# Altium PCB ChildPCBRocket.PcbDoc
Units mil, origin at the board's own origin, x right, y up, seen from the top; angles counter-clockwise.
Board outline 1300 x 3325 mil, 2 copper layers (Top Layer, Bottom Layer); 18 components, 16 nets, 91 pads, 0 vias.
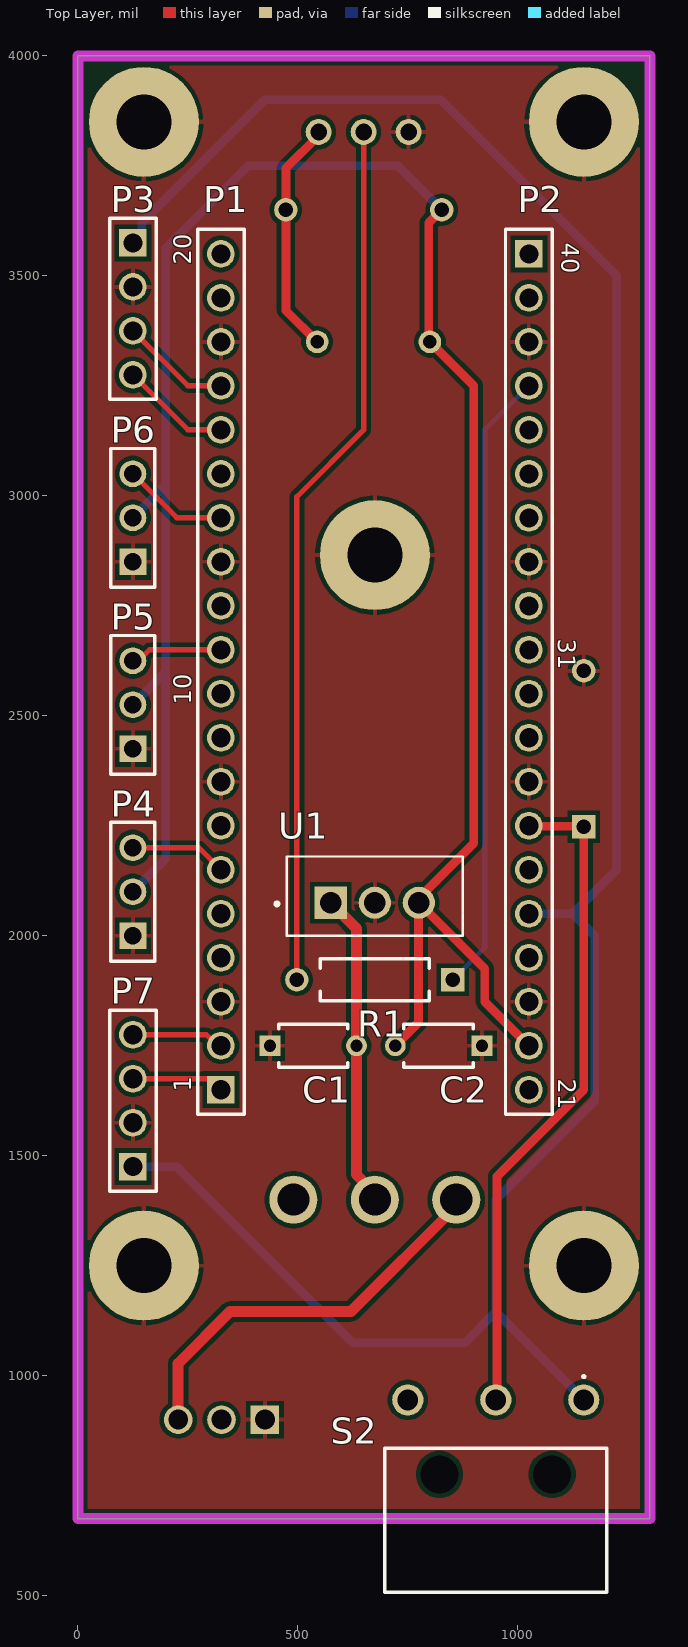
[diagram p0: Top Layer view]
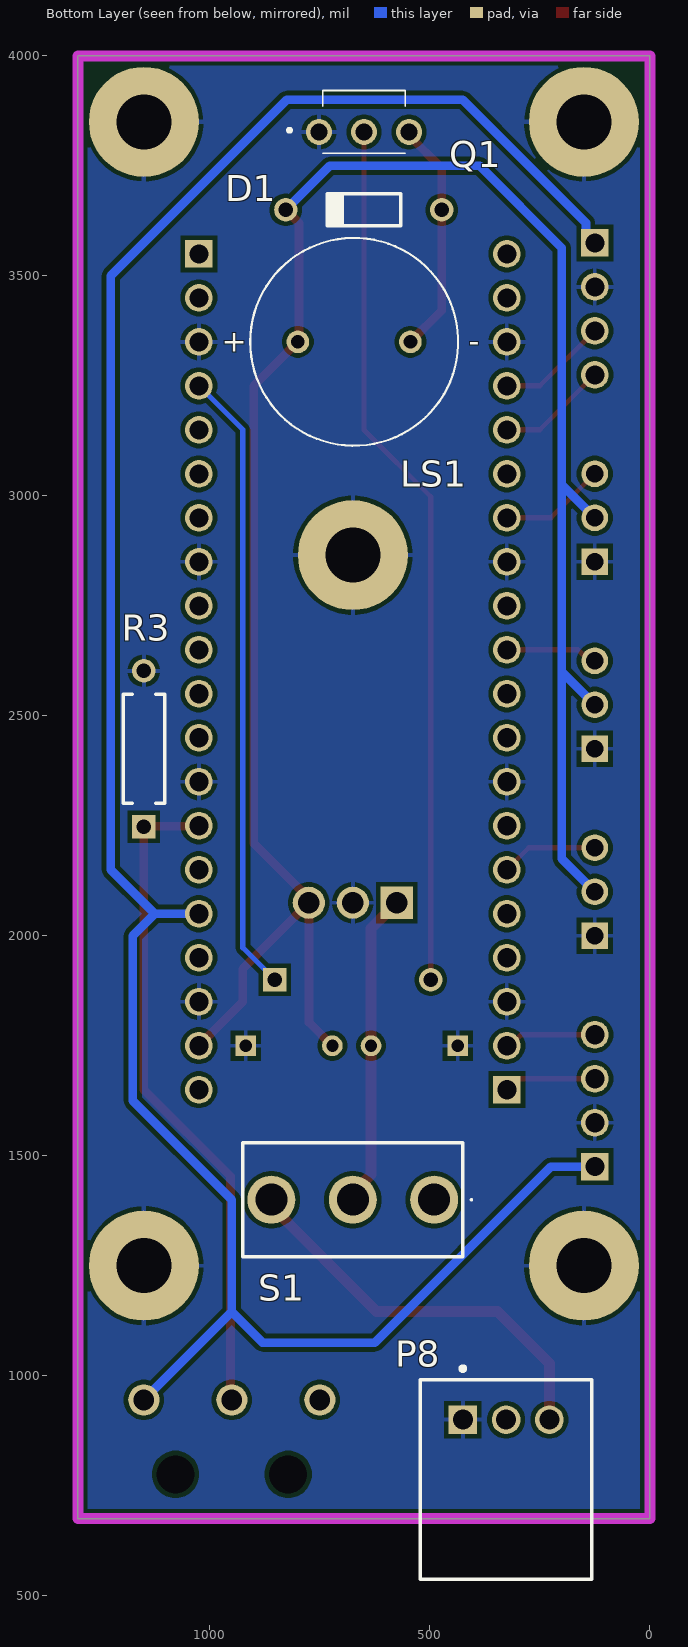
[diagram p1: Bottom Layer view, seen from below]
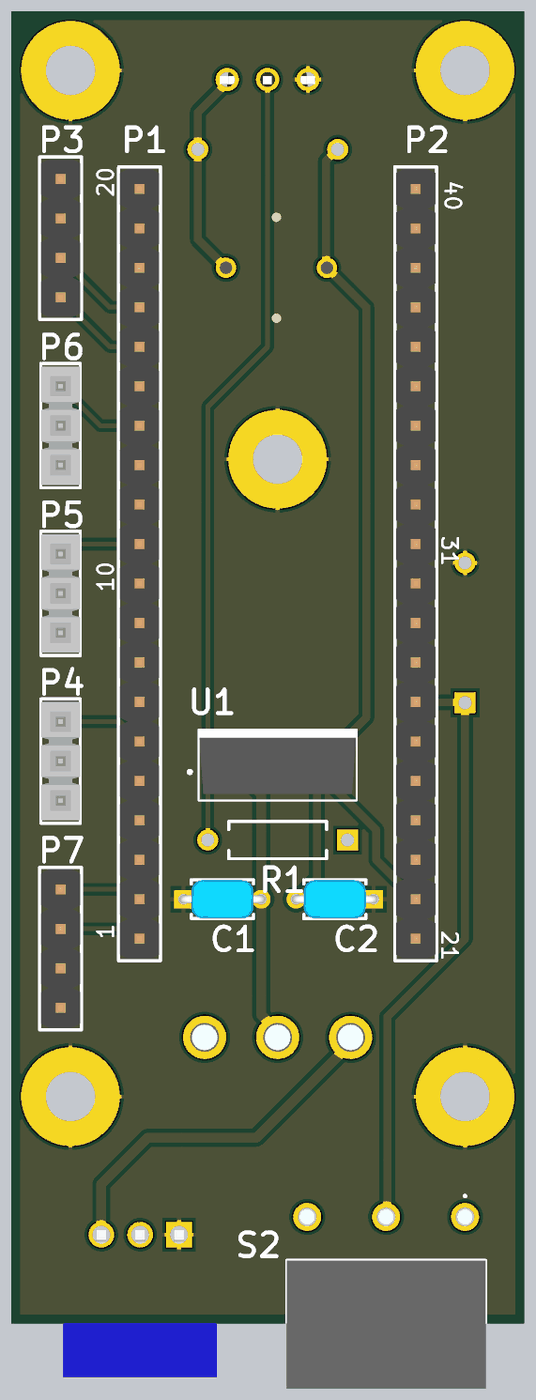
[diagram p2: 3D render of the assembled board from above, using the file's embedded part models]
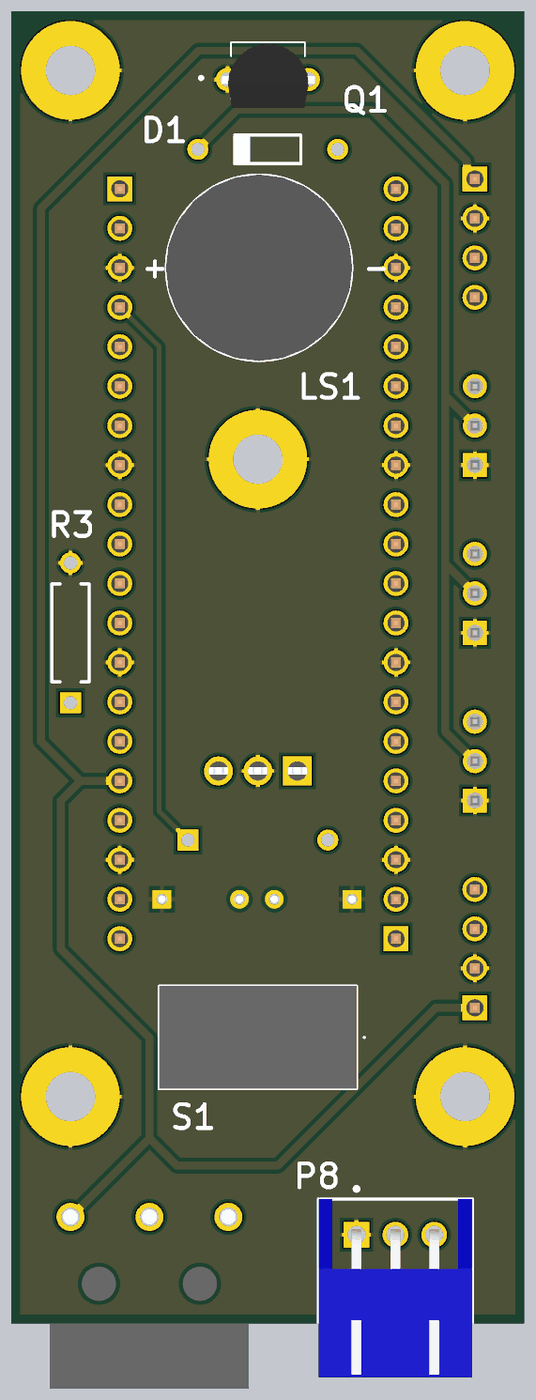
[diagram p3: 3D render of the assembled board from below, using the file's embedded part models]

## Layer stack, top to bottom
Top Solder: solder mask 0.4, Solder Resist, Dk 3.5
Top Layer: signal copper 1.4
Dielectric 1: dielectric 12.6, FR-4, Dk 4.8
Bottom Layer: signal copper 1.4
Bottom Solder: solder mask 0.4, Solder Resist, Dk 3.5

## Board outline
0,4000 1300,4000 1300,675 0,675

## Design rules (kind name [scope] priority, off if disabled: settings)
Clearance [All] p1: gap=10 ignorepadtopadclearanceinfootprint=FALSE except(0: Arc-Hole Track-Hole SMDPad-Hole THPad-Hole Via-Hole Fill-Hole Poly-Hole Region-Hole Text-Hole)
PolygonConnect [All] p1: connectstyle=Relief reliefconductorwidth=10 reliefentries=4 polygonreliefangle="90 Angle" airgapwidth=10
RoutingVias [All] p1: holewidth=15 width=30 viastyle="Through Hole" minholewidth=15 minwidth=30 maxholewidth=28 maxwidth=50
SolderMaskExpansion [All] p1: expansion=4 istentingtop=FALSE
Width [All] p1: maxlimit=50 minlimit=10 preferedwidth=12
30 further rules are at their usual default settings.

## Classes and differential pairs
component class ChildPCBRocket: C1 C2 D1 LS1 P1 P2 P3 P4 P5 P6 P7 Q1 R1 R3 S1 U1

## Components (designator, comment, footprint, x,y, rotation, side; value= is the part's Value field where it differs from the comment)
C1 "0.22uF" FP-RCE1K1-2_5-MFG 535,1750 r0 top
C2 "0.22uF" FP-RCE1K1-2_5-MFG 820,1750 r180 top
D1 "1N4148" NXP-SOD27-2_V 650,3650 r0 bottom locked
LS1 "CEM-1203" CUI_CEM-1203(42) 672.05,3350 r180 bottom locked
P1 "61302011121" 61302011121 325,2600 r90 top locked
P2 "61302011121" 61302011121 1025,2600 r270 top locked
P3 "61300411121" 61300411121 125,3425 r270 top locked
P4 "TSW-103-07-L-S" SMTC-TSW-103-07-X-S 125,2000 r90 top locked
P5 "TSW-103-07-L-S" SMTC-TSW-103-07-X-S 125,2425 r90 top locked
P6 "TSW-103-07-L-S" SMTC-TSW-103-07-X-S 125,2850 r90 top locked
P7 "61300411121" 61300411121 125,1625 r90 top locked
P8 "S3B-XH-A(LF)(SN)" JST-S3B-XH-A(LF)(SN)_V 326.57,900 r180 bottom locked
Q1 "2N3904TF" BC33740TA 685,3850 r180 bottom locked
R1 "MFR-25FBF52-100R" RESA60-630X240 675,1900 r180 top locked value=180R
R3 "MFR-25FBF52-100R" RESA60-630X240 1150,2425 r90 bottom locked value=10K
S1 "SS12D10" SS12D10 490,1400 r90 bottom locked
S2 "D2F-01FL-A" D2F01FLA 1150,945 r180 top locked
U1 "LM340AT-5.0/NOPB" TO254P1054X470X1955-3 675,2075 r0 top locked

## Footprints (in the part's own frame and the unit in brackets; to place one, negate y for a bottom-side part, rotate by r counter-clockwise, add the part's x,y. Pads: shape width x height; smd on the part's side, far side on the other; paste and mask are expansions set on the pad)
61300411121 [mm] "Pin Header, pitch 2.54 mm, THT, Vertical, single row, 4p"
  rect 1.6x1.6 hole 1.1: 1(-3.81,0)
  round 1.6 hole 1.1: 2(-1.27,0) 3(1.27,0) 4(3.81,0)
  silkscreen extent -5.23,-1.35 5.23,1.35, body extent -5.08,-1.27 5.08,1.27, height 8.57
61302011121 [mm] "Pin Header, pitch 2.54 mm, THT, Vertical, single row, 20p"
  rect 1.6x1.6 hole 1.1: 1(-24.13,0)
  round 1.6 hole 1.1: 2(-21.59,0) 3(-19.05,0) 4(-16.51,0) 5(-13.97,0) 6(-11.43,0) 7(-8.89,0) 8(-6.35,0) 9(-3.81,0) 10(-1.27,0) 11(1.27,0) 12(3.81,0) 13(6.35,0) 14(8.89,0) 15(11.43,0) 16(13.97,0) 17(16.51,0) 18(19.05,0) 19(21.59,0) 20(24.13,0)
  silkscreen extent -25.55,-1.35 25.55,1.35, body extent -25.4,-1.27 25.4,1.27, height 8.57
BC33740TA [mm]
  round 1.493 hole 0.96: 1(-1.7,-0.585) 2(0.9,-0.585) 3(3.5,-0.585)
  silkscreen extent -3.5,-1.81 3.28,1.81, body extent -2.16,-2.42 4,1.71, height 8.67
CUI_CEM-1203(42) [mm]
  round 1.308 hole 0.8: N(3.25,0) P(-3.25,0)
  silkscreen extent -6,-6 6,6, body extent -6,-6 6,6, height 8.5
D2F01FLA [mm]
  round 1.8 hole 1.2: 1(0,0) 2(5.08,0) 3(10.16,0)
  round 1.1 hole 2.2 unplated: MH1(1.83,4.3) MH2(8.33,4.3)
  silkscreen extent -1.32,-1.4 11.48,11.1, body extent -1.32,-0.5 11.48,11.1, height 6.05
FP-RCE1K1-2_5-MFG [mm]
  rect 1.2x1.2 hole 0.7 paste-1000 mask+0: 1(-2.5,0)
  round 1.2 hole 0.7 paste-1000 mask+0: 2(2.5,0)
  silkscreen extent -2,-1.25 2,1.25, body extent -3.2,-1.35 3.2,1.35, height 0.25
JST-S3B-XH-A(LF)(SN)_V [mm] "Header, 3-Leads, Body 9.9x11.5mm, Pitch 2.5mm"
  rect 1.65x1.65 hole 1.15: 1(-2.5,0)
  round 1.65 hole 1.15: 2(0,0) 3(2.5,0)
  silkscreen extent -4.95,-9.2 4.95,3.08, body extent -4.95,-9.2 4.95,2.3, height 6.15
NXP-SOD27-2_V [mm] "SOD27, 2-Leads, Dia 1.85mm, Body Length 4.25mm, Pin Spacing 9mm"
  round 1.35 hole 0.85: 1(-4.5,0) 2(4.5,0)
  silkscreen extent -2.12,-0.93 2.12,0.92, body extent -4.78,-0.93 4.78,0.92, height 1.85
RESA60-630X240 [mm] "Axial Resistor, 2-Leads, Dia 2.4mm, Body Length 6.3mm"
  rect 1.35x1.35 hole 0.85: 1(-4.5,0)
  round 1.35 hole 0.85: 2(4.5,0)
  silkscreen extent -3.15,-1.2 3.15,1.2, body extent -4.77,-1.19 4.77,1.2, height 2.4
SMTC-TSW-103-07-X-S [mm] ".025 SQ Post Terminal Strip Assembly, 1x3 Pins, Vertical, 2.54mm Pitch, Male"
  rect 1.55x1.55 hole 1.02: 1(0,0)
  round 1.55 hole 1.02: 2(2.54,0) 3(5.08,0)
  silkscreen extent -1.46,-1.27 6.54,1.27, body extent -1.27,-1.27 6.35,1.27, height 8.38
SS12D10 [mm]
  round 2.775 hole 1.85: 1(0,0) 2(0,4.7) 3(0,9.4)
  silkscreen extent -3.3,-2.2 3.3,11.05, body extent -3.3,-1.65 3.3,11.05, height 10.01
TO254P1054X470X1955-3 [mm]
  rect 1.86x1.86 hole 1.24: 1(-2.54,0)
  round 1.86 hole 1.24: 2(0,0) 3(2.54,0)
  silkscreen extent -5.75,-1.91 5.08,2.67, body extent -5.08,-1.49 5.08,2.71, height 22.86

## Part data
C1 C2: library part CMP-06035-036150-1, "Cap Ceramic Monolithic 220nF 50V 10% Thru-Hole Bulk", Capacitance=220nF, Case/Package=Radial, Dielectric=X7R, Max Operating Temperature=125°C, Min Operating Temperature=-55°C, Package Quantity=1, Ratings=AEC-Q200, Resistor Type=Ceramic, Tolerance=10%, Voltage Rating=50V, Height=3.5mm, Height - Seated (Max)=0.138inch, Lead Diameter=0.5mm, Lead Pitch=0.197inch, Lead/Base Style="Formed Leads", Length=0.157inch, Mount="Through Hole", Packaging="Tape and Reel", Termination=Radial, Voltage Rating (DC)=50V, Width=0.098inch
D1: library part CMP-0648-00002-1, "High-speed Diode, 100 V, 450 mA, 2-Pin SOD27, RoHS", Manufacturer="NXP Semiconductors", Cd="4 pF Max.", ComponentLink1Description="Manufacturer URL", ComponentLink1URL=http://www.nxp.com/, ComponentLink2Description=Datasheet, ComponentLink2URL=http://www.nxp.com/documents/data_sheet/1N4148_1N4448.pdf, ComponentLink3Description="Package Specification", ComponentLink3URL=http://www.nxp.com/documents/data_sheet/1N4148_1N4448.pdf, Configuration=Single, DatasheetVersion=Aug-04, IF="200 mA Max.", IFRM="450 mA", IFSM="4 A Max.", IR (VR="20 V)=25 nA", Mounting Technology="Through Hole", PackageDescription="2-Pin Hermetically Sealed Glass Package, Axial Leaded, Dia 1.85 mm, Body Length 4.25 mm, Lead Spread 25.4 mm", PackageReference=SOD27, PackageVersion=Aug-04, PartNumber=1N4148, RoHS=TRUE, Trr="4 ns Max.", VF (IF="10 mA)=1 V", VR="100 V Max."
LS1: library part CEM-1203(42), "12 mm, 3.5 V, 85 dB, Through Hole, Magnetic Audio Transducer Buzzer", Package=None, Availability=Unavailable, MF="{'manufacturer': u'CUI Devices'}", MP=CEM-1203(42), Price=None
P1 P2: library part CMP-1502-01102-1, "THT Vertical Pin Header WR-PHD, Pitch 2.54 mm, Single Row, 20 pins", Contact Resistance=20mOhm, Manufacturer="Wurth Elektronik", Operating Temperature=-40to105degC, Rated Current=3A, Withstanding Voltage=500VAC, Working Voltage=250VAC, Datasheet URL=https://katalog.we-online.de/em/datasheet/6130xx11121.pdf, Gender=Male, Manufacturer URL=http://www.we-online.de, Mounting Technology=THT, Orientation=Vertical, Package Reference=61302011121, Packaging=Bag, Part Number=61302011121, Pin Number=20, Pitch=2.54mm, Publisher=WurthElektronik, Row Number=Single
P3 P7: library part CMP-1502-01064-1, "THT Vertical Pin Header WR-PHD, Pitch 2.54 mm, Single Row, 4 pins", Contact Resistance=20mOhm, Manufacturer="Wurth Elektronik", Operating Temperature=-40to105degC, Rated Current=3A, Withstanding Voltage=500VAC, Working Voltage=250VAC, Datasheet URL=https://katalog.we-online.de/em/datasheet/6130xx11121.pdf, Gender=Male, Manufacturer URL=http://www.we-online.de, Mounting Technology=THT, Orientation=Vertical, Package Reference=61300411121, Packaging=Bag, Part Number=61300411121, Pin Number=4, Pitch=2.54mm, Publisher=WurthElektronik, Row Number=Single
P4 P5 P6: library part CMP-1024-00334-1, "0.025\" SQ Post Header, Through-hole, Vertical, -55 to 125 degC, 2.54 mm Pitch, 3-Pin, Male, RoHS", Manufacturer=Samtec, Temperature Range="-55 to 125 degC", ComponentLink1Description="Manufacturer URL", ComponentLink1URL=http://www.samtec.com, ComponentLink2Description=Datasheet, ComponentLink2URL=http://www.samtec.com/documents/webfiles/pdf/TSW_TH.PDF, ComponentLink3Description="Package Specification", ComponentLink3URL=http://www.samtec.com/documents/webfiles/cpdf/TSW-XXX-XX-XXX-X-XX-XXX-MKT.pdf, DatasheetVersion=F-214, Mounting Technology=Through-hole, Orientation=Vertical, PackageDescription=".025[0.64] SQ. Post Terminal Strip Assembly", PackageReference=TSW-103-07-X-S, PackageVersion="DM, 8/1988", PartNumber=TSW-103-07-L-S, Pitch="2.54 mm", RoHS=True
P8: library part CMP-1755-00006-1, "Male Header, Pitch 2.5 mm, 1 x 3 Position, Height 6.1 mm, Tail Length 3.4 mm, -25 to 85 degC, RoHS, Bulk", Case\Package=DIP, Frequency="1.8 MHz", Max Operating Temperature="70 degC", Max Ouput Current="-10 mA", Max Power Dissipation="1 W", Max Supply Voltage="15 V", Min Operating Temperature="0 degC", Min Supply Voltage="1 V", Nominal Supply Current="170 uA", Package Quantity=50, Channels=1, ComponentLink1Description="Manufacturer URL", ComponentLink1URL=http://www.jst.com/home2.html, ComponentLink2Description=Datasheet, ComponentLink2URL=http://www.jst-mfg.com/product/pdf/eng/eXH.pdf, DatasheetVersion=May-16, Height="4.57 mm", Length="9.81 mm", Mount="Through Hole", PackageDescription="Male Header, Pitch 2.5 mm, 1 x 3 Position, Height 6.1 mm, Tail Length 3.4 mm", PackageReference=S3B-XH-A(LF)(SN), Packaging=Rail/Tube, Pins=8, Radiation Hardening=No, REACH SVHC="No SVHC", RoHSCompliant=true, Weight="0.015535 oz", Width="6.35 mm"
Q1: "Transistor BJT NPN", Manufacturer_Name="ON Semiconductor", Mouser Part Number=512-2N3904TF, Arrow Part Number=2N3904TF, Arrow Price/Stock=https://www.arrow.com/en/products/2n3904tf/on-semiconductor, Datasheet Link=http://www.onsemi.com/pub/Collateral/2N3904-D.pdf, Manufacturer_Part_Number=2N3904TF, Mouser Price/Stock=https://www.mouser.co.uk/ProductDetail/ON-Semiconductor-Fairchild/2N3904TF?qs=UMEuL5FsraAGLMCvg3Q72w%3D%3D
R1 R3: library part CMP-009-00046-4, "Axial Resistor, 100 Ohm, +/- 1%, 0.25 W, -55 to 155 degC, 2-Pin THD, RoHS, Bulk", Case/Package=Axial, Manufacturer=Yageo, Max Operating Temperature=155°C, Min Operating Temperature=-55°C, Package Description="2-Pin Axial Lead, Dia 2.4 mm, Body Length 6.3 mm", Package Quantity=200, Package Reference=MFR-25, Power=250mW, Tolerance=1%, Voltage Rating=250V, Composition=CarbonFilm, Datasheet URL=http://www.yageo.com/documents/recent/Yageo%20LR_MFR_2013.pdf, Datasheet Version=Apr-13, Manufacturer URL=http://www.yageo.com/, Mounting Technology=TH, Packaging=Bulk, RoHS Compliant=True
S1: "Switch", Manufacturer_Name=DAIER, Datasheet Link=https://www.chinadaier.com/slide-switch-spdt/, Height=9.91mm, Manufacturer_Part_Number=SS12D10
S2: "Switch", Manufacturer_Name="Omron Electronics", Mouser Part Number=653-D2F-01FL-A, Arrow Part Number=D2F-01FL-A, Arrow Price/Stock=https://www.arrow.com/en/products/d2f-01fl-a/omron, Datasheet Link=https://media.digikey.com/pdf/Data%20Sheets/Omron%20PDFs/D2F_0318_DS.pdf, Height=5.95mm, Manufacturer_Part_Number=D2F-01FL-A, Mouser Price/Stock=https://www.mouser.co.uk/ProductDetail/Omron-Electronics/D2F-01FL-A?qs=qyG%2FS5Z4lv1aHIvVPnq%252BCw%3D%3D
U1: Package=None, Availability=Unavailable, MF="{'manufacturer': u'Texas Instruments'}", MP=LM340AT-5.0/NOPB, Price=None

## Free pads (board coordinates)
  round 250 hole 125: 6(150,3850) 7(1150,3850) 8(150,1250) 9(1150,1250) 10(675,2865)

## Nets (pads, with @x,y where several pads share a name; then routed paths per layer and width w, separated by ;. In a path a pad name is that pad's centre, name@x,y a point inside that pad or via, vN(x,y) a via of type N, cw(c..) or ccw(c..) an arc to the next point about the centre after c; other vN are vias at no path point)
+3V3: P2.16 P3.1 P7.1 S2.1 | length 5336.5
  Top Layer w20: S2.1@1144.29,944.29 S2.1@1152.95,944.29
  Bottom Layer w20: P7.1 225,1475 625,1075 880,1075 950,1145 ; P3.1 145.21,3595.21 145.21,3620.21 425,3900 825,3900 1225,3500 1225,2150 1125,2050 ; P2.16 1125,2050 ; S2.1 950,1145 ; 950,1145 950,1400 1175,1625 1175,2000 1125,2050
+5: C2.2 D1.2 LS1.P P2.19 P4.2 P5.2 P6.2 U1.3 | length 4914.4
  Top Layer w20: C2.2 774.58,1803.01 U1.3@774.58,2075 ; LS1.P@793.97,3343.97 LS1.P@797.5,3343.97 ; LS1.P@797.5,3347.5 797.5,3620.34 D1.2 ; LS1.P 900,3250 900,2210.38 775,2085.38 U1.3 925,1925 925,1850 P2.19
  Bottom Layer w20: P4.2 200,2175 200,2600 ; P5.2 200,2600 ; P6.2 200,3025 ; D1.2 727.17,3750 386.72,3750 200,3563.28 200,3025 ; 200,2600 200,3025
+9: C1.2 S1.2 U1.1 | length 716.4
  Top Layer w25: U1.1 633.43,2016.57 C1.2 633.43,1456.77 675.04,1415.16 S1.2
+VBAT: P8.3 S1.3 | length 922.8
  Top Layer w25: P8.3 228.15,1028.15 345.76,1145.76 620.76,1145.76 860.08,1385.08 S1.3
GND: C1.1 C2.1 P1.3 P1.8 P1.13 P1.18 P2.3 P2.8 P2.13 P2.18 P3.2 P4.1 P5.1 P6.1 P7.2 P8.1 pad.6 pad.7 pad.8 pad.9 pad.10 Q1.1 R3.2 U1.2
GPIO_ACC: P2.14 R3.1 S2.2 | length 1511.1
  Top Layer w20: S2.2@952.95,944.29 952.95,1452.95 1150,1650 R3.1 1148.92,2248.92 1026.08,2248.92 P2.14
NetD1_1: D1.1 LS1.N Q1.3 | length 537.3
  Top Layer w20: LS1.N 472.83,3421.26 472.83,3744.59 547.2,3818.96 Q1.3
NetQ1_2: Q1.2 R1.2 | length 1999.3
  Top Layer w12: R1.2 497.83,2997.83 649.57,3149.57 Q1.2@649.57,3836.49
PWM1: P2.4 R1.1 | length 1421.6
  Bottom Layer w12: R1.1 925,1972.83 925,3150 P2.4
PWM2: P1.6 P4.3 | length 220.7
  Top Layer w12: P4.3 275,2200 P1.6
PWM3: P1.11 P5.3 | length 210.4
  Top Layer w12: P5.3 138.27,2625 163.27,2650 P1.11
PWM4: P1.14 P6.3 | length 241.4
  Top Layer w12: P6.3 225,2950 P1.14
SCL: P1.17 P3.3 | length 251.8
  Top Layer w12: P3.3 250,3250 P1.17
SDA: P1.16 P3.4 | length 251.8
  Top Layer w12: P3.4 250,3150 P1.16
"UART RX": P1.2 P7.4 | length 210.4
  Top Layer w12: P7.4 292.47,1775 317.47,1750 P1.2
"UART TX": P1.1 P7.3 | length 210.4
  Top Layer w12: P7.3 300,1675 P1.1
pads on no net: P1.4 P1.5 P1.7 P1.9 P1.10 P1.12 P1.15 P1.19 P1.20 P2.1 P2.2 P2.5 P2.6 P2.7 P2.9 P2.10 P2.11 P2.12 P2.15 P2.17 P2.20 P8.2 S1.1 S2.3 S2.MH1 S2.MH2

## Polygon pours and split planes (outlines as drawn)
GND on Top Layer "GND_L01_P000" (solid, pour order 0): 0,4000 1300,4000 1300,675 0,675
GND on Bottom Layer "GND_L02_P001" (solid, pour order 1): 0,4000 1300,4000 1300,675 0,675

## Keep-outs
Keep-Out Layer:
  the board outline again, w25

## Text inside footprints (layer, text, board x,y; h text height)
LS1: Bottom Overlay "+" at 973.44,3327.51 h50.1; Bottom Overlay "-" at 411.9,3327.52 h50.08
P1: Top Overlay "20" at 258.07,3525.2 h40 r90; Top Overlay "1" at 258.07,1645.28 h40 r90; Top Overlay "10" at 258.07,2525.2 h40 r90
P2: Top Overlay "21" at 1091.93,1674.8 h40 r270; Top Overlay "40" at 1100,3575 h40 r270; Top Overlay "31" at 1091.93,2674.8 h40 r270